# EAGLE board Aquila-2018-Color&MV (EAGLE 9.1.1)
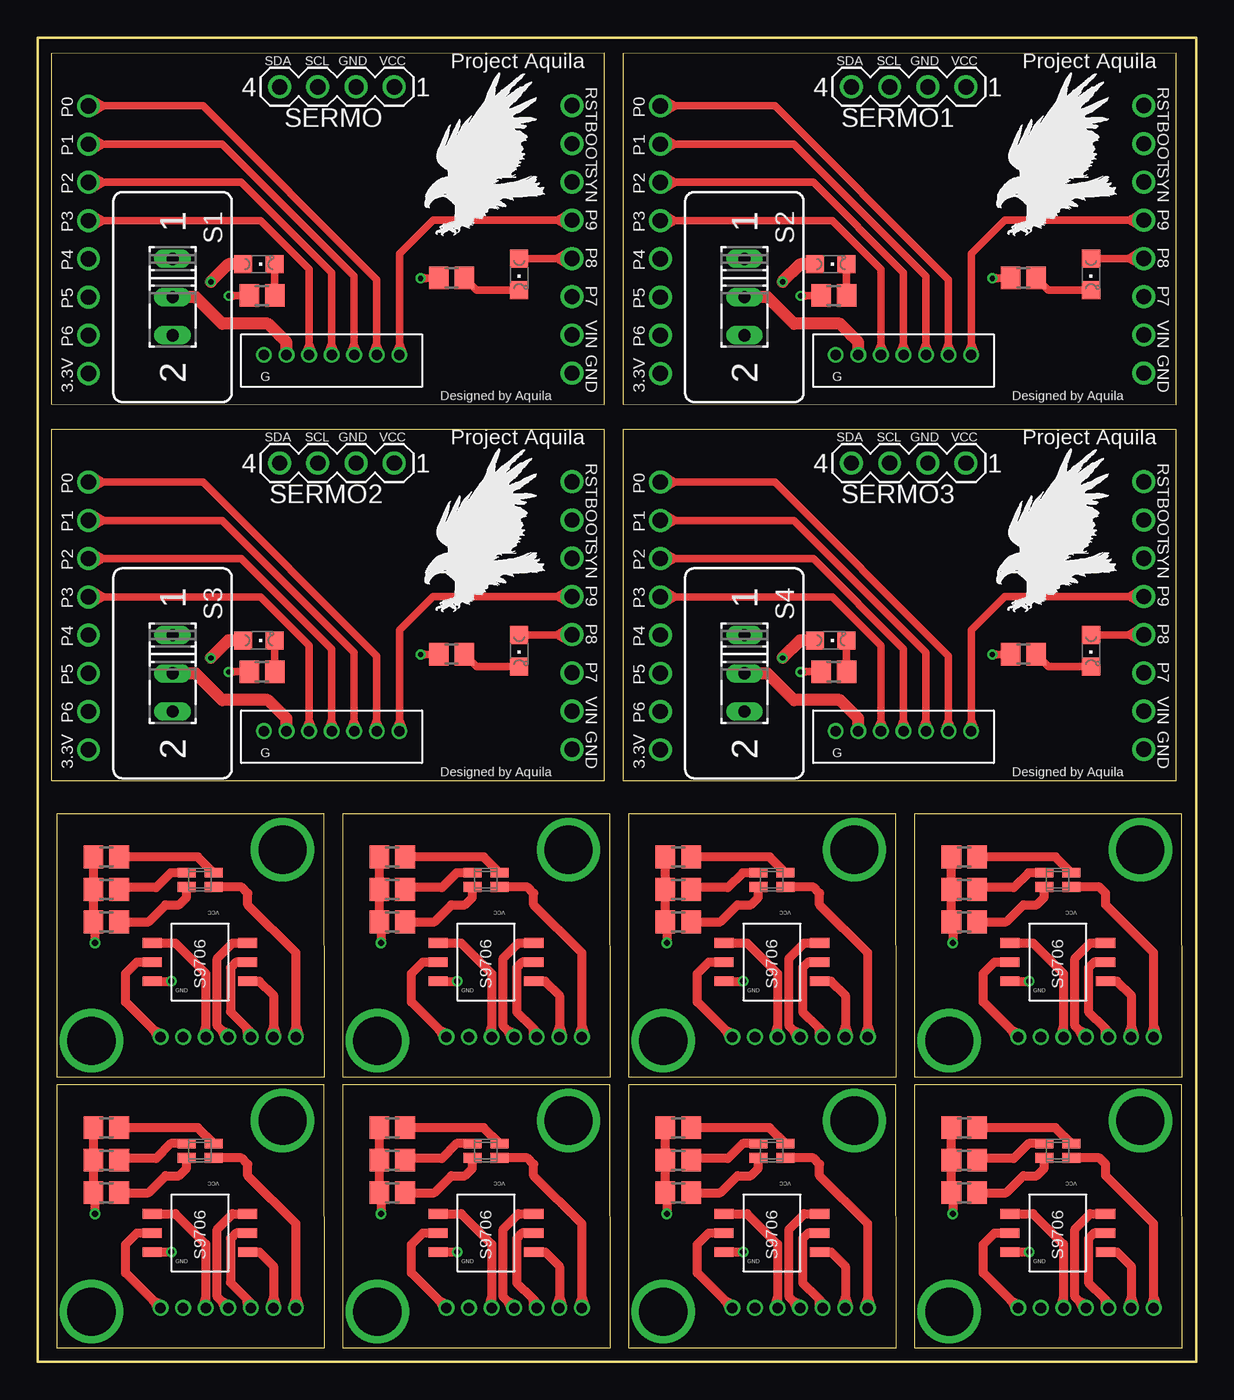
[diagram p0: board, top side]
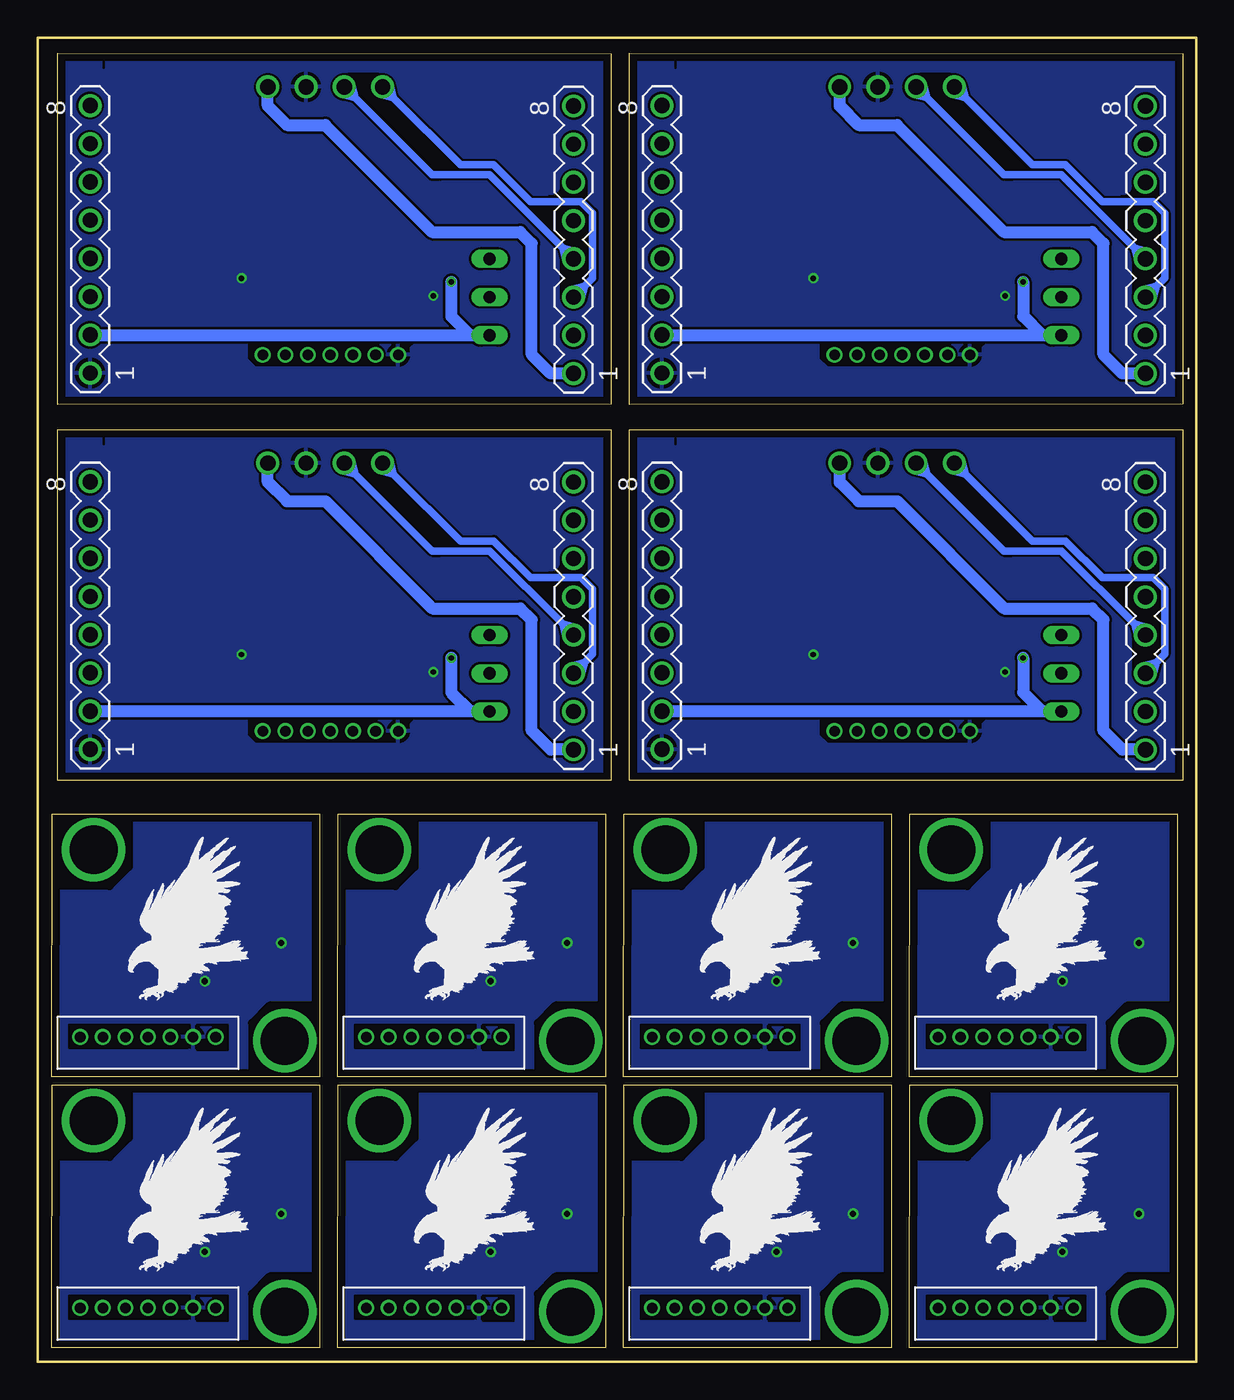
[diagram p1: board, bottom side, seen from below]

Size 77 x 88 mm. Coordinates in mm from the lower left corner, seen from the top.
Outline: 0,0 0,88 77,88 77,0 0,0
Outline: 0.89,63.65 37.67,63.62 37.67,86.97 0.89,86.94 0.89,63.65
Outline: 38.89,63.65 75.67,63.62 75.67,86.97 38.89,86.94 38.89,63.65
Outline: 1.27,0.95 19.07,0.95 19.03,18.4 1.27,18.4 1.27,0.95
Outline: 20.27,0.95 38.07,0.95 38.03,18.4 20.27,18.4 20.27,0.95
Outline: 39.27,0.95 57.07,0.95 57.03,18.4 39.27,18.4 39.27,0.95
Outline: 58.27,0.95 76.07,0.95 76.03,18.4 58.27,18.4 58.27,0.95
Outline: 1.27,18.95 19.07,18.95 19.03,36.4 1.27,36.4 1.27,18.95
Outline: 20.27,18.95 38.07,18.95 38.03,36.4 20.27,36.4 20.27,18.95
Outline: 39.27,18.95 57.07,18.95 57.03,36.4 39.27,36.4 39.27,18.95
Outline: 58.27,18.95 76.07,18.95 76.03,36.4 58.27,36.4 58.27,18.95
Outline: 0.89,38.65 37.67,38.62 37.67,61.97 0.89,61.94 0.89,38.65
Outline: 38.89,38.65 75.67,38.62 75.67,61.97 38.89,61.94 38.89,38.65
Copper layers (1*16): Top 0.035mm / dielectric 1.6mm / Bottom 0.035mm
Design rules "Elecrow_2-layer_PCB_eagle_rule": minimum track width 6mil, minimum drill 12mil, track to track 6mil, track to pad 6mil, pad to pad 6mil, via to via 8mil, smd to smd 0mil, copper to edge 20mil, drill to drill 10mil, minimum pad ring 6mil, minimum via ring 6mil, stop-mask expansion 0mil, vias tented up to drill 100mil, thermal gap 10mil
bRestrict: 140 lines

## Footprints (pad centres in the part's own frame; a part is rotated, then mirrored left to right if it is on the bottom)
B7B-ZR = drill 0.7: 1 10.5,-1.3; 2 9,-1.3; 3 7.5,-1.3; 4 6,-1.3; 5 4.5,-1.3; 6 3,-1.3; 7 1.5,-1.3
CHIPLED_0805 = smd 1.2 x 1.2: A 0,-1.05; C 0,1.05
GM1WA55311A = smd 0.65 x 1.2: 1 -0.475,0.9; 2 -0.475,-0.9; 3 0.475,-0.9; 4 0.475,0.9
R0805 = smd 1.3 x 1.5: 1 -0.85,0; 2 0.85,0
M251 = drill 0.813 long: 1 -2.54,0; 2 0,0; 3 2.54,0
MA04-1 = drill 1.016: 1 -3.81,0; 2 -1.27,0; 3 1.27,0; 4 3.81,0
MA08-1 = drill 1.016: 1 -8.89,0; 2 -6.35,0; 3 -3.81,0; 4 -1.27,0; 5 1.27,0; 6 3.81,0; 7 6.35,0; 8 8.89,0
S9706 = smd 1.27 x 0.635: CK 7.62,3.81; DOUT 1.27,5.08; GATE 7.62,5.08; GND 1.27,2.54; RANGE 7.62,2.54; VDD 1.27,3.81

## Placement (x,y rotation side)
CN5  COLOR-ZH-M  [B7B-ZR]  18.67,4.89 0 bottom
CN6  COLOR-ZH-M  [B7B-ZR]  37.67,4.89 0 bottom
CN7  COLOR-ZH-M  [B7B-ZR]  56.67,4.89 0 bottom
CN8  COLOR-ZH-M  [B7B-ZR]  75.67,4.89 0 bottom
CN9  COLOR-ZH-M  [B7B-ZR]  18.67,22.89 0 bottom
CN10  COLOR-ZH-M  [B7B-ZR]  37.67,22.89 0 bottom
CN11  COLOR-ZH-M  [B7B-ZR]  56.67,22.89 0 bottom
CN12  COLOR-ZH-M  [B7B-ZR]  75.67,22.89 0 bottom
L1  SP-L  [CHIPLED_0805]  14.71,72.94 270 top
L2  LED  [CHIPLED_0805]  32.01,72.26 180 top
L3  SP-L  [CHIPLED_0805]  52.71,72.94 270 top
L4  LED  [CHIPLED_0805]  70.01,72.26 180 top
L5  SP-L  [CHIPLED_0805]  14.71,47.94 270 top
L6  LED  [CHIPLED_0805]  32.01,47.26 180 top
L7  SP-L  [CHIPLED_0805]  52.71,47.94 270 top
L8  LED  [CHIPLED_0805]  70.01,47.26 180 top
LED5  GM1WA55311A  [GM1WA55311A]  10.79,14.03 270 top
LED6  GM1WA55311A  [GM1WA55311A]  29.8,14.03 270 top
LED7  GM1WA55311A  [GM1WA55311A]  48.8,14.03 270 top
LED8  GM1WA55311A  [GM1WA55311A]  67.8,14.03 270 top
LED9  GM1WA55311A  [GM1WA55311A]  10.79,32.03 270 top
LED10  GM1WA55311A  [GM1WA55311A]  29.8,32.03 270 top
LED11  GM1WA55311A  [GM1WA55311A]  48.8,32.03 270 top
LED12  GM1WA55311A  [GM1WA55311A]  67.8,32.03 270 top
LED-R  330  [R0805]  27.51,72.03 0 top
LED-R1  330  [R0805]  65.51,72.03 0 top
LED-R2  330  [R0805]  27.51,47.03 0 top
LED-R3  330  [R0805]  65.51,47.03 0 top
MV1  B7B-ZR  [B7B-ZR]  13.54,68.22 0 top
MV2  B7B-ZR  [B7B-ZR]  51.54,68.22 0 top
MV3  B7B-ZR  [B7B-ZR]  13.54,43.22 0 top
MV4  B7B-ZR  [B7B-ZR]  51.54,43.22 0 top
R13  330  [R0805]  4.57,13.4 0 top
R14  330  [R0805]  4.57,11.24 0 top
R15  330  [R0805]  4.57,15.55 0 top
R16  330  [R0805]  23.57,13.4 0 top
R17  330  [R0805]  23.57,11.24 0 top
R18  330  [R0805]  23.57,15.55 0 top
R19  330  [R0805]  42.57,13.4 0 top
R20  330  [R0805]  42.57,11.24 0 top
R21  330  [R0805]  42.57,15.55 0 top
R22  330  [R0805]  61.57,13.4 0 top
R23  330  [R0805]  61.57,11.24 0 top
R24  330  [R0805]  61.57,15.55 0 top
R25  330  [R0805]  4.57,31.4 0 top
R26  330  [R0805]  4.57,29.24 0 top
R27  330  [R0805]  4.57,33.55 0 top
R28  330  [R0805]  23.57,31.4 0 top
R29  330  [R0805]  23.57,29.24 0 top
R30  330  [R0805]  23.57,33.55 0 top
R31  330  [R0805]  42.57,31.4 0 top
R32  330  [R0805]  42.57,29.24 0 top
R33  330  [R0805]  42.57,33.55 0 top
R34  330  [R0805]  61.57,31.4 0 top
R35  330  [R0805]  61.57,29.24 0 top
R36  330  [R0805]  61.57,33.55 0 top
S1  [M251]  8.97,70.76 270 top
S2  [M251]  46.97,70.76 270 top
S3  [M251]  8.97,45.76 270 top
S4  [M251]  46.97,45.76 270 top
SERMO  [MA04-1]  19.89,84.73 180 top
SERMO1  [MA04-1]  57.89,84.73 180 top
SERMO2  [MA04-1]  19.89,59.73 180 top
SERMO3  [MA04-1]  57.89,59.73 180 top
SP-R  330  [R0805]  14.91,70.86 0 top
SP-R1  330  [R0805]  52.91,70.86 0 top
SP-R2  330  [R0805]  14.91,45.86 0 top
SP-R3  330  [R0805]  52.91,45.86 0 top
SV1  [MA08-1]  35.51,74.6 90 bottom
SV2  [MA08-1]  3.38,74.57 90 bottom
SV3  [MA08-1]  73.51,74.6 90 bottom
SV4  [MA08-1]  41.38,74.57 90 bottom
SV5  [MA08-1]  35.51,49.6 90 bottom
SV6  [MA08-1]  3.38,49.57 90 bottom
SV7  [MA08-1]  73.51,49.6 90 bottom
SV8  [MA08-1]  41.38,49.57 90 bottom
U$1  [EAGLE-PLC-8MM]  25.73,74.82 0 top
U$2  [EAGLE-PLC-8MM]  63.73,74.82 0 top
U$3  [EAGLE-PLC-8MM]  25.73,49.82 0 top
U$4  [EAGLE-PLC-8MM]  63.73,49.82 0 top
U$11  S9706  [S9706]  6.35,22.76 0 top
U$12  [EAGLE-PLC-8MM]  13.97,24.03 0 bottom
U$13  S9706  [S9706]  6.35,4.76 0 top
U$14  [EAGLE-PLC-8MM]  13.97,6.03 0 bottom
U$15  S9706  [S9706]  25.35,4.76 0 top
U$16  [EAGLE-PLC-8MM]  32.97,6.03 0 bottom
U$17  S9706  [S9706]  44.35,4.76 0 top
U$18  [EAGLE-PLC-8MM]  51.97,6.03 0 bottom
U$19  S9706  [S9706]  63.35,4.76 0 top
U$20  [EAGLE-PLC-8MM]  70.97,6.03 0 bottom
U$21  S9706  [S9706]  25.35,22.76 0 top
U$22  [EAGLE-PLC-8MM]  32.97,24.03 0 bottom
U$23  S9706  [S9706]  44.35,22.76 0 top
U$24  [EAGLE-PLC-8MM]  51.97,24.03 0 bottom
U$25  S9706  [S9706]  63.35,22.76 0 top
U$26  [EAGLE-PLC-8MM]  70.97,24.03 0 bottom

## Library data of the parts
CN5-CN12 MV1-MV4 = jst
L1-L8 LED5-LED12 = led
LED-R LED-R1-LED-R3 R13-R36 SP-R SP-R1-SP-R3 = 0@Mylibrary-main1
S1-S4 = switch
SERMO SERMO1-SERMO3 SV1-SV8 = 0con-lstb; OC_FARNELL: unknown; OC_NEWARK: unknown
U$1-U$4 U$12 U$14 U$16 U$18 U$20 U$22 U$24 U$26 = logo
U$11 U$13 U$15 U$17 U$19 U$21 U$23 U$25 = S9706

## Nets
+3V1: SERMO1.1 SV4.1
+3V2: SERMO2.1 SV6.1
+3V3: SERMO.1 SV2.1
+3V4: SERMO3.1 SV8.1
+3V7: CN9.1 U$11.VDD
+3V8: CN10.1 U$21.VDD
+3V9: CN5.1 U$13.VDD
+3V10: CN6.1 U$15.VDD
+3V11: CN7.1 U$17.VDD
+3V12: CN8.1 U$19.VDD
+3V13: CN11.1 U$23.VDD
+3V14: CN12.1 U$25.VDD
+5V: L1.A S1.3 SV1.2
+5V1: L3.A S2.3 SV3.2
+5V2: L5.A S3.3 SV5.2
+5V3: L7.A S4.3 SV7.2
+5V6: CN9.7 LED9.4
+5V7: CN10.7 LED10.4
+5V8: CN5.7 LED5.4
+5V9: CN6.7 LED6.4
+5V10: CN7.7 LED7.4
+5V11: CN8.7 LED8.4
+5V12: CN11.7 LED11.4
+5V13: CN12.7 LED12.4
BOOT: SV1.7
BOOT1: SV3.7
BOOT2: SV5.7
BOOT3: SV7.7
CK4: CN5.5 U$13.CK
CK5: CN6.5 U$15.CK
CK6: CN7.5 U$17.CK
CK7: CN8.5 U$19.CK
CK8: CN9.5 U$11.CK
CK9: CN10.5 U$21.CK
CK10: CN11.5 U$23.CK
CK11: CN12.5 U$25.CK
DOUT4: CN5.3 U$13.DOUT
DOUT5: CN6.3 U$15.DOUT
DOUT6: CN7.3 U$17.DOUT
DOUT7: CN8.3 U$19.DOUT
DOUT8: CN9.3 U$11.DOUT
DOUT9: CN10.3 U$21.DOUT
DOUT10: CN11.3 U$23.DOUT
DOUT11: CN12.3 U$25.DOUT
GATE4: CN5.4 U$13.GATE
GATE5: CN6.4 U$15.GATE
GATE6: CN7.4 U$17.GATE
GATE7: CN8.4 U$19.GATE
GATE8: CN9.4 U$11.GATE
GATE9: CN10.4 U$21.GATE
GATE10: CN11.4 U$23.GATE
GATE11: CN12.4 U$25.GATE
GND: LED-R.1 MV1.7 SERMO.2 SP-R.1 SV1.1
GND1: LED-R1.1 MV2.7 SERMO1.2 SP-R1.1 SV3.1
GND2: LED-R2.1 MV3.7 SERMO2.2 SP-R2.1 SV5.1
GND3: LED-R3.1 MV4.7 SERMO3.2 SP-R3.1 SV7.1
GND6: CN9.2 R25.1 R26.1 R27.1 U$11.GND
GND7: CN10.2 R28.1 R29.1 R30.1 U$21.GND
GND8: CN5.2 R13.1 R14.1 R15.1 U$13.GND
GND9: CN6.2 R16.1 R17.1 R18.1 U$15.GND
GND10: CN7.2 R19.1 R20.1 R21.1 U$17.GND
GND11: CN8.2 R22.1 R23.1 R24.1 U$19.GND
GND12: CN11.2 R31.1 R32.1 R33.1 U$23.GND
GND13: CN12.2 R34.1 R35.1 R36.1 U$25.GND
MISOD: MV1.3 SV2.7
MISOD1: MV2.3 SV4.7
MISOD2: MV3.3 SV6.7
MISOD3: MV4.3 SV8.7
MOSID: MV1.2 SV2.8
MOSID1: MV2.2 SV4.8
MOSID2: MV3.2 SV6.8
MOSID3: MV4.2 SV8.8
MV: MV1.1 SV1.5
MV1: MV2.1 SV3.5
MV2: MV3.1 SV5.5
MV3: MV4.1 SV7.5
MVS: MV1.5 SV2.5
MVS1: MV2.5 SV4.5
MVS2: MV3.5 SV6.5
MVS3: MV4.5 SV8.5
N$1: MV1.6 S1.2
N$2: L2.C LED-R.2
N$3: MV2.6 S2.2
N$4: L3.C SP-R1.2
N$5: L4.C LED-R1.2
N$6: MV3.6 S3.2
N$7: L5.C SP-R2.2
N$8: L6.C LED-R2.2
N$9: MV4.6 S4.2
N$10: L7.C SP-R3.2
N$11: L8.C LED-R3.2
N$25: LED9.2 R25.2
N$26: LED9.3 R26.2
N$27: LED9.1 R27.2
N$30: LED10.2 R28.2
N$31: LED5.2 R13.2
N$32: LED5.3 R14.2
N$33: LED5.1 R15.2
N$36: LED6.2 R16.2
N$37: LED6.3 R17.2
N$38: LED6.1 R18.2
N$41: LED7.2 R19.2
N$42: LED7.3 R20.2
N$43: L1.C SP-R.2
N$44: LED7.1 R21.2
N$48: LED8.2 R22.2
N$49: LED8.3 R23.2
N$50: LED8.1 R24.2
N$53: LED10.3 R29.2
N$54: LED10.1 R30.2
N$57: LED11.2 R31.2
N$58: LED11.3 R32.2
N$59: LED11.1 R33.2
N$62: LED12.2 R34.2
N$63: LED12.3 R35.2
N$64: LED12.1 R36.2
P1: L4.A SV3.4
P2: SV3.3
P3: SERMO1.3 SV4.4
P4: SERMO.3 SV2.4
P5: SERMO.4 SV2.3
P6: SV2.2
P7: SV1.3
P8: L2.A SV1.4
P9: SERMO1.4 SV4.3
P10: SV4.2
P11: L6.A SV5.4
P12: SV5.3
P13: SERMO2.3 SV6.4
P14: SERMO2.4 SV6.3
P15: SV6.2
P16: L8.A SV7.4
P17: SV7.3
P18: SERMO3.3 SV8.4
P19: SERMO3.4 SV8.3
P20: SV8.2
RANGE4: CN5.6 U$13.RANGE
RANGE5: CN6.6 U$15.RANGE
RANGE6: CN7.6 U$17.RANGE
RANGE7: CN8.6 U$19.RANGE
RANGE8: CN9.6 U$11.RANGE
RANGE9: CN10.6 U$21.RANGE
RANGE10: CN11.6 U$23.RANGE
RANGE11: CN12.6 U$25.RANGE
RST: SV1.8
RST1: SV3.8
RST2: SV5.8
RST3: SV7.8
SCKD: MV1.4 SV2.6
SCKD1: MV2.4 SV4.6
SCKD2: MV3.4 SV6.6
SCKD3: MV4.4 SV8.6
SYN: SV1.6
SYN1: SV3.6
SYN2: SV5.6
SYN3: SV7.6

## Tracks (layer width: path | path; a pad name or v marks a point on that pad's centre or on a via)
+3V1
  Bottom 0.813: SERMO1.1 61.7,83.46 60.43,82.19 57.89,82.19 50.78,75.08 44.94,75.08 44.17,74.32 44.17,66.95 42.9,65.68 SV4.1
+3V2
  Bottom 0.813: SERMO2.1 23.7,58.46 22.43,57.19 19.89,57.19 12.78,50.08 6.94,50.08 6.17,49.32 6.17,41.95 4.9,40.68 SV6.1
+3V3
  Bottom 0.813: SERMO.1 23.7,83.46 22.43,82.19 19.89,82.19 12.78,75.08 6.94,75.08 6.17,74.32 6.17,66.95 4.9,65.68 SV2.1
+3V4
  Bottom 0.813: SERMO3.1 61.7,58.46 60.43,57.19 57.89,57.19 50.78,50.08 44.94,50.08 44.17,49.32 44.17,41.95 42.9,40.68 SV8.1
+3V7
  Top 0.61: CN9.1 7.67,22.08 | 7.67,22.08 5.84,23.91 5.84,25.81 6.6,26.57 U$11.VDD | 7.67,22.08 7.97,21.49 CN9.1 | 7.67,22.08 8.27,21.78 CN9.1
+3V8
  Top 0.61: CN10.1 26.67,22.08 | 26.67,22.08 24.84,23.91 24.84,25.81 25.6,26.57 U$21.VDD | 26.67,22.08 26.97,21.49 CN10.1 | 26.67,22.08 27.27,21.78 CN10.1
+3V9
  Top 0.61: CN5.1 7.67,4.08 | 7.67,4.08 5.84,5.91 5.84,7.81 6.6,8.57 U$13.VDD | 7.67,4.08 7.97,3.49 CN5.1 | 7.67,4.08 8.27,3.78 CN5.1
+3V10
  Top 0.61: CN6.1 26.67,4.08 | 26.67,4.08 24.84,5.91 24.84,7.81 25.6,8.57 U$15.VDD | 26.67,4.08 26.97,3.49 CN6.1 | 26.67,4.08 27.27,3.78 CN6.1
+3V11
  Top 0.61: CN7.1 45.67,4.08 | 45.67,4.08 43.84,5.91 43.84,7.81 44.6,8.57 U$17.VDD | 45.67,4.08 45.97,3.49 CN7.1 | 45.67,4.08 46.27,3.78 CN7.1
+3V12
  Top 0.61: CN8.1 64.67,4.08 | 64.67,4.08 62.84,5.91 62.84,7.81 63.6,8.57 U$19.VDD | 64.67,4.08 64.97,3.49 CN8.1 | 64.67,4.08 65.27,3.78 CN8.1
+3V13
  Top 0.61: CN11.1 45.67,22.08 | 45.67,22.08 43.84,23.91 43.84,25.81 44.6,26.57 U$23.VDD | 45.67,22.08 45.97,21.49 CN11.1 | 45.67,22.08 46.27,21.78 CN11.1
+3V14
  Top 0.61: CN12.1 64.67,22.08 | 64.67,22.08 62.84,23.91 62.84,25.81 63.6,26.57 U$25.VDD | 64.67,22.08 64.97,21.49 CN12.1 | 64.67,22.08 65.27,21.78 CN12.1
+5V  (via drill 0.35)
  Top 0.813: L1.A 12.68,72.94 v11.51,71.78
  Bottom 0.813: S1.3 8.99,68.25 10.26,68.25 | SV1.2 10.26,68.25 | v11.51,71.78 11.51,69.49 10.26,68.25
+5V1  (via drill 0.35)
  Top 0.813: L3.A 50.68,72.94 v49.51,71.78
  Bottom 0.813: S2.3 46.99,68.25 48.26,68.25 | SV3.2 48.26,68.25 | v49.51,71.78 49.51,69.49 48.26,68.25
+5V2  (via drill 0.35)
  Top 0.813: L5.A 12.68,47.94 v11.51,46.78
  Bottom 0.813: S3.3 8.99,43.24 10.26,43.24 | SV5.2 10.26,43.24 | v11.51,46.78 11.51,44.49 10.26,43.24
+5V3  (via drill 0.35)
  Top 0.813: L7.A 50.68,47.94 v49.51,46.78
  Bottom 0.813: S4.3 46.99,43.24 48.26,43.24 | SV7.2 48.26,43.24 | v49.51,46.78 49.51,44.49 48.26,43.24
+5V6
  Top 0.61: CN9.7 17.17,22.29 | 17.17,22.29 17.17,27.18 13.97,30.38 13.97,31.14 13.56,31.56 LED9.4 | 17.17,22.29 16.96,21.66 CN9.7 | 17.17,22.29 17.38,21.66 CN9.7
+5V7
  Top 0.61: CN10.7 36.17,22.29 | 36.17,22.29 36.17,27.18 32.97,30.38 32.97,31.14 32.56,31.56 LED10.4 | 36.17,22.29 35.96,21.66 CN10.7 | 36.17,22.29 36.38,21.66 CN10.7
+5V8
  Top 0.61: CN5.7 17.17,4.29 | 17.17,4.29 17.17,9.18 13.97,12.38 13.97,13.14 13.56,13.56 LED5.4 | 17.17,4.29 16.96,3.66 CN5.7 | 17.17,4.29 17.38,3.66 CN5.7
+5V9
  Top 0.61: CN6.7 36.17,4.29 | 36.17,4.29 36.17,9.18 32.97,12.38 32.97,13.14 32.56,13.56 LED6.4 | 36.17,4.29 35.96,3.66 CN6.7 | 36.17,4.29 36.38,3.66 CN6.7
+5V10
  Top 0.61: CN7.7 55.17,4.29 | 55.17,4.29 55.17,9.18 51.97,12.38 51.97,13.14 51.56,13.56 LED7.4 | 55.17,4.29 54.96,3.66 CN7.7 | 55.17,4.29 55.38,3.66 CN7.7
+5V11
  Top 0.61: CN8.7 74.17,4.29 | 74.17,4.29 74.17,9.18 70.97,12.38 70.97,13.14 70.56,13.56 LED8.4 | 74.17,4.29 73.96,3.66 CN8.7 | 74.17,4.29 74.38,3.66 CN8.7
+5V12
  Top 0.61: CN11.7 55.17,22.29 | 55.17,22.29 55.17,27.18 51.97,30.38 51.97,31.14 51.56,31.56 LED11.4 | 55.17,22.29 54.96,21.66 CN11.7 | 55.17,22.29 55.38,21.66 CN11.7
+5V13
  Top 0.61: CN12.7 74.17,22.29 | 74.17,22.29 74.17,27.18 70.97,30.38 70.97,31.14 70.56,31.56 LED12.4 | 74.17,22.29 73.96,21.66 CN12.7 | 74.17,22.29 74.38,21.66 CN12.7
CK4
  Top 0.61: U$13.CK 13.21,8.57 12.83,8.19 12.83,5.27 13.87,4.22 | 13.87,4.22 14.17,3.93 CN5.5 | 13.87,4.22 13.95,3.56 CN5.5 | 13.87,4.22 14.33,3.74 CN5.5
CK5
  Top 0.61: U$15.CK 32.21,8.57 31.83,8.19 31.83,5.27 32.87,4.22 | 32.87,4.22 33.17,3.93 CN6.5 | 32.87,4.22 32.95,3.56 CN6.5 | 32.87,4.22 33.33,3.74 CN6.5
CK6
  Top 0.61: U$17.CK 51.21,8.57 50.83,8.19 50.83,5.27 51.87,4.22 | 51.87,4.22 52.17,3.93 CN7.5 | 51.87,4.22 51.95,3.56 CN7.5 | 51.87,4.22 52.33,3.74 CN7.5
CK7
  Top 0.61: U$19.CK 70.21,8.57 69.83,8.19 69.83,5.27 70.87,4.22 | 70.87,4.22 71.17,3.93 CN8.5 | 70.87,4.22 70.95,3.56 CN8.5 | 70.87,4.22 71.33,3.74 CN8.5
CK8
  Top 0.61: U$11.CK 13.21,26.57 12.83,26.19 12.83,23.27 13.87,22.22 | 13.87,22.22 14.17,21.93 CN9.5 | 13.87,22.22 13.95,21.56 CN9.5 | 13.87,22.22 14.33,21.74 CN9.5
CK9
  Top 0.61: U$21.CK 32.21,26.57 31.83,26.19 31.83,23.27 32.87,22.22 | 32.87,22.22 33.17,21.93 CN10.5 | 32.87,22.22 32.95,21.56 CN10.5 | 32.87,22.22 33.33,21.74 CN10.5
CK10
  Top 0.61: U$23.CK 51.21,26.57 50.83,26.19 50.83,23.27 51.87,22.22 | 51.87,22.22 52.17,21.93 CN11.5 | 51.87,22.22 51.95,21.56 CN11.5 | 51.87,22.22 52.33,21.74 CN11.5
CK11
  Top 0.61: U$25.CK 70.21,26.57 69.83,26.19 69.83,23.27 70.87,22.22 | 70.87,22.22 71.17,21.93 CN12.5 | 70.87,22.22 70.95,21.56 CN12.5 | 70.87,22.22 71.33,21.74 CN12.5
DOUT4
  Top 0.61: U$13.DOUT 9.14,9.84 11.17,7.82 11.17,4.29 | 11.17,4.29 CN5.3 10.96,3.66 11.17,4.29
DOUT5
  Top 0.61: U$15.DOUT 28.14,9.84 30.17,7.82 30.17,4.29 | 30.17,4.29 CN6.3 29.96,3.66 30.17,4.29
DOUT6
  Top 0.61: U$17.DOUT 47.14,9.84 49.17,7.82 49.17,4.29 | 49.17,4.29 CN7.3 48.96,3.66 49.17,4.29
DOUT7
  Top 0.61: U$19.DOUT 66.14,9.84 68.17,7.82 68.17,4.29 | 68.17,4.29 CN8.3 67.96,3.66 68.17,4.29
DOUT8
  Top 0.61: U$11.DOUT 9.14,27.84 11.17,25.81 11.17,22.29 | 11.17,22.29 CN9.3 10.96,21.66 11.17,22.29
DOUT9
  Top 0.61: U$21.DOUT 28.14,27.84 30.17,25.81 30.17,22.29 | 30.17,22.29 CN10.3 29.96,21.66 30.17,22.29
DOUT10
  Top 0.61: U$23.DOUT 47.14,27.84 49.17,25.81 49.17,22.29 | 49.17,22.29 CN11.3 48.96,21.66 49.17,22.29
DOUT11
  Top 0.61: U$25.DOUT 66.14,27.84 68.17,25.81 68.17,22.29 | 68.17,22.29 CN12.3 67.96,21.66 68.17,22.29
GATE4
  Top 0.61: CN5.4 12.17,4.08 | 12.17,4.08 11.94,4.32 11.94,8.82 12.95,9.84 U$13.GATE | 12.17,4.08 12.47,3.49 CN5.4 | 12.17,4.08 12.77,3.78 CN5.4
GATE5
  Top 0.61: CN6.4 31.17,4.08 | 31.17,4.08 30.94,4.32 30.94,8.82 31.95,9.84 U$15.GATE | 31.17,4.08 31.47,3.49 CN6.4 | 31.17,4.08 31.77,3.78 CN6.4
GATE6
  Top 0.61: CN7.4 50.17,4.08 | 50.17,4.08 49.94,4.32 49.94,8.82 50.95,9.84 U$17.GATE | 50.17,4.08 50.47,3.49 CN7.4 | 50.17,4.08 50.77,3.78 CN7.4
GATE7
  Top 0.61: CN8.4 69.17,4.08 | 69.17,4.08 68.94,4.32 68.94,8.82 69.95,9.84 U$19.GATE | 69.17,4.08 69.47,3.49 CN8.4 | 69.17,4.08 69.77,3.78 CN8.4
GATE8
  Top 0.61: CN9.4 12.17,22.08 | 12.17,22.08 11.94,22.32 11.94,26.82 12.95,27.84 U$11.GATE | 12.17,22.08 12.47,21.49 CN9.4 | 12.17,22.08 12.77,21.78 CN9.4
GATE9
  Top 0.61: CN10.4 31.17,22.08 | 31.17,22.08 30.94,22.32 30.94,26.82 31.95,27.84 U$21.GATE | 31.17,22.08 31.47,21.49 CN10.4 | 31.17,22.08 31.77,21.78 CN10.4
GATE10
  Top 0.61: CN11.4 50.17,22.08 | 50.17,22.08 49.94,22.32 49.94,26.82 50.95,27.84 U$23.GATE | 50.17,22.08 50.47,21.49 CN11.4 | 50.17,22.08 50.77,21.78 CN11.4
GATE11
  Top 0.61: CN12.4 69.17,22.08 | 69.17,22.08 68.94,22.32 68.94,26.82 69.95,27.84 U$25.GATE | 69.17,22.08 69.47,21.49 CN12.4 | 69.17,22.08 69.77,21.78 CN12.4
GND  (via drill 0.35)
  Top 0.508: LED-R.1 arc-90 26.64,72 25.98,72 | 25.98,72 v25.45,72 | SP-R.1 13.23,70.86 | 13.23,70.86 12.98,70.86 v12.7,70.84 | 25.98,72 25.46,72.08 v25.45,72 | 25.98,72 25.46,71.93 v25.45,72 | 13.23,70.86 12.71,70.91 v12.7,70.84 | 13.23,70.86 12.72,70.76 v12.7,70.84
  pour Bottom: 0.84,88.54 37.67,88.54 37.67,63.14 0.84,63.14
GND1  (via drill 0.35)
  Top 0.508: LED-R1.1 arc-90 64.64,72 63.98,72 | 63.98,72 v63.45,72 | SP-R1.1 51.23,70.86 | 51.23,70.86 50.98,70.86 v50.7,70.84 | 63.98,72 63.46,72.08 v63.45,72 | 63.98,72 63.46,71.93 v63.45,72 | 51.23,70.86 50.71,70.91 v50.7,70.84 | 51.23,70.86 50.72,70.76 v50.7,70.84
  pour Bottom: 38.84,88.54 75.67,88.54 75.67,63.14 38.84,63.14
GND2  (via drill 0.35)
  Top 0.508: LED-R2.1 arc-90 26.64,47.01 25.98,47.01 | 25.98,47.01 v25.45,47.01 | SP-R2.1 13.23,45.86 | 13.23,45.86 12.98,45.86 v12.7,45.84 | 25.98,47.01 25.46,47.08 v25.45,47.01 | 25.98,47.01 25.46,46.93 v25.45,47.01 | 13.23,45.86 12.71,45.91 v12.7,45.84 | 13.23,45.86 12.72,45.76 v12.7,45.84
  pour Bottom: 0.84,63.54 37.67,63.54 37.67,38.14 0.84,38.14
GND3  (via drill 0.35)
  Top 0.508: LED-R3.1 arc-90 64.64,47.01 63.98,47.01 | 63.98,47.01 v63.45,47.01 | SP-R3.1 51.23,45.86 | 51.23,45.86 50.98,45.86 v50.7,45.84 | 63.98,47.01 63.46,47.08 v63.45,47.01 | 63.98,47.01 63.46,46.93 v63.45,47.01 | 51.23,45.86 50.71,45.91 v50.7,45.84 | 51.23,45.86 50.72,45.76 v50.7,45.84
  pour Bottom: 38.84,63.54 75.67,63.54 75.67,38.14 38.84,38.14
GND6  (via drill 0.4)
  Top 0.61: U$11.GND v8.89,25.3 | R27.1 R25.1 R26.1 3.81,29.15 v3.81,27.84
  pour Bottom: 1.27,36.73 19.05,36.73 19.05,18.95 1.27,18.95
GND7  (via drill 0.4)
  Top 0.61: U$21.GND v27.89,25.3 | R30.1 R28.1 R29.1 22.81,29.15 v22.81,27.84
  pour Bottom: 20.27,36.73 38.05,36.73 38.05,18.95 20.27,18.95
GND8  (via drill 0.4)
  Top 0.61: U$13.GND v8.89,7.3 | R15.1 R13.1 R14.1 3.81,11.15 v3.81,9.84
  pour Bottom: 1.27,18.73 19.05,18.73 19.05,0.95 1.27,0.95
GND9  (via drill 0.4)
  Top 0.61: U$15.GND v27.89,7.3 | R18.1 R16.1 R17.1 22.81,11.15 v22.81,9.84
  pour Bottom: 20.27,18.73 38.05,18.73 38.05,0.95 20.27,0.95
GND10  (via drill 0.4)
  Top 0.61: U$17.GND v46.89,7.3 | R21.1 R19.1 R20.1 41.81,11.15 v41.81,9.84
  pour Bottom: 39.27,18.73 57.05,18.73 57.05,0.95 39.27,0.95
GND11  (via drill 0.4)
  Top 0.61: U$19.GND v65.89,7.3 | R24.1 R22.1 R23.1 60.81,11.15 v60.81,9.84
  pour Bottom: 58.27,18.73 76.05,18.73 76.05,0.95 58.27,0.95
GND12  (via drill 0.4)
  Top 0.61: U$23.GND v46.89,25.3 | R33.1 R31.1 R32.1 41.81,29.15 v41.81,27.84
  pour Bottom: 39.27,36.73 57.05,36.73 57.05,18.95 39.27,18.95
GND13  (via drill 0.4)
  Top 0.61: U$25.GND v65.89,25.3 | R36.1 R34.1 R35.1 60.81,29.15 v60.81,27.84
  pour Bottom: 58.27,36.73 76.05,36.73 76.05,18.95 58.27,18.95
MISOD
  Top 0.508: MV1.3 21.04,67.62 | 21.04,67.62 21.04,72.15 12.27,80.92 4.4,80.92 | 4.4,80.92 SV2.7 | 21.04,67.62 20.79,67.03 MV1.3 | 21.04,67.62 21.29,67.03 MV1.3 | 4.4,80.92 3.63,81.36 SV2.7 | 4.4,80.92 3.63,80.48 SV2.7
MISOD1
  Top 0.508: MV2.3 59.04,67.62 | 59.04,67.62 59.04,72.15 50.27,80.92 42.4,80.92 | 42.4,80.92 SV4.7 | 59.04,67.62 58.79,67.03 MV2.3 | 59.04,67.62 59.29,67.03 MV2.3 | 42.4,80.92 41.63,81.36 SV4.7 | 42.4,80.92 41.63,80.48 SV4.7
MISOD2
  Top 0.508: MV3.3 21.04,42.62 | 21.04,42.62 21.04,47.15 12.27,55.92 4.4,55.92 | 4.4,55.92 SV6.7 | 21.04,42.62 20.79,42.02 MV3.3 | 21.04,42.62 21.29,42.02 MV3.3 | 4.4,55.92 3.63,56.36 SV6.7 | 4.4,55.92 3.63,55.48 SV6.7
MISOD3
  Top 0.508: MV4.3 59.04,42.62 | 59.04,42.62 59.04,47.15 50.27,55.92 42.4,55.92 | 42.4,55.92 SV8.7 | 59.04,42.62 58.79,42.02 MV4.3 | 59.04,42.62 59.29,42.02 MV4.3 | 42.4,55.92 41.63,56.36 SV8.7 | 42.4,55.92 41.63,55.48 SV8.7
MOSID
  Top 0.508: SV2.8 4.4,83.46 | 4.4,83.46 11,83.46 22.54,71.92 22.54,67.62 | 22.54,67.62 MV1.2 | 22.54,67.62 22.29,67.03 MV1.2 | 22.54,67.62 22.79,67.03 MV1.2 | 4.4,83.46 3.63,83.9 SV2.8 | 4.4,83.46 3.63,83.02 SV2.8
MOSID1
  Top 0.508: SV4.8 42.4,83.46 | 42.4,83.46 49,83.46 60.54,71.92 60.54,67.62 | 60.54,67.62 MV2.2 | 60.54,67.62 60.29,67.03 MV2.2 | 60.54,67.62 60.79,67.03 MV2.2 | 42.4,83.46 41.63,83.9 SV4.8 | 42.4,83.46 41.63,83.02 SV4.8
MOSID2
  Top 0.508: SV6.8 4.4,58.46 | 4.4,58.46 11,58.46 22.54,46.92 22.54,42.62 | 22.54,42.62 MV3.2 | 22.54,42.62 22.29,42.02 MV3.2 | 22.54,42.62 22.79,42.02 MV3.2 | 4.4,58.46 3.63,58.9 SV6.8 | 4.4,58.46 3.63,58.02 SV6.8
MOSID3
  Top 0.508: SV8.8 42.4,58.46 | 42.4,58.46 49,58.46 60.54,46.92 60.54,42.62 | 60.54,42.62 MV4.2 | 60.54,42.62 60.29,42.02 MV4.2 | 60.54,42.62 60.79,42.02 MV4.2 | 42.4,58.46 41.63,58.9 SV8.8 | 42.4,58.46 41.63,58.02 SV8.8
MV
  Top 0.508: 24.04,67.62 24.04,73.64 26.27,75.86 34.49,75.86 | 24.04,67.62 MV1.1 | SV1.5 34.49,75.86 | 24.04,67.62 23.79,67.03 MV1.1 | 24.04,67.62 24.29,67.03 MV1.1 | 34.49,75.86 35.26,75.42 SV1.5 | 34.49,75.86 35.26,76.31 SV1.5
MV1
  Top 0.508: 62.04,67.62 62.04,73.64 64.27,75.86 72.5,75.86 | 62.04,67.62 MV2.1 | SV3.5 72.5,75.86 | 62.04,67.62 61.79,67.03 MV2.1 | 62.04,67.62 62.29,67.03 MV2.1 | 72.5,75.86 73.26,75.42 SV3.5 | 72.5,75.86 73.26,76.31 SV3.5
MV2
  Top 0.508: 24.04,42.62 24.04,48.64 26.27,50.87 34.49,50.87 | 24.04,42.62 MV3.1 | SV5.5 34.49,50.87 | 24.04,42.62 23.79,42.02 MV3.1 | 24.04,42.62 24.29,42.02 MV3.1 | 34.49,50.87 35.26,50.42 SV5.5 | 34.49,50.87 35.26,51.3 SV5.5
MV3
  Top 0.508: 62.04,42.62 62.04,48.64 64.27,50.87 72.5,50.87 | 62.04,42.62 MV4.1 | SV7.5 72.5,50.87 | 62.04,42.62 61.79,42.02 MV4.1 | 62.04,42.62 62.29,42.02 MV4.1 | 72.5,50.87 73.26,50.42 SV7.5 | 72.5,50.87 73.26,51.3 SV7.5
MVS
  Top 0.508: SV2.5 4.4,75.84 | 4.4,75.84 14.81,75.84 18.04,72.61 18.04,67.62 | 18.04,67.62 MV1.5 | 4.4,75.84 3.63,76.28 SV2.5 | 4.4,75.84 3.63,75.4 SV2.5 | 18.04,67.62 17.79,67.03 MV1.5 | 18.04,67.62 18.29,67.03 MV1.5
MVS1
  Top 0.508: SV4.5 42.4,75.84 | 42.4,75.84 52.81,75.84 56.04,72.61 56.04,67.62 | 56.04,67.62 MV2.5 | 42.4,75.84 41.63,76.28 SV4.5 | 42.4,75.84 41.63,75.4 SV4.5 | 56.04,67.62 55.79,67.03 MV2.5 | 56.04,67.62 56.29,67.03 MV2.5
MVS2
  Top 0.508: SV6.5 4.4,50.84 | 4.4,50.84 14.81,50.84 18.04,47.61 18.04,42.62 | 18.04,42.62 MV3.5 | 4.4,50.84 3.63,51.28 SV6.5 | 4.4,50.84 3.63,50.4 SV6.5 | 18.04,42.62 17.79,42.02 MV3.5 | 18.04,42.62 18.29,42.02 MV3.5
MVS3
  Top 0.508: SV8.5 42.4,50.84 | 42.4,50.84 52.81,50.84 56.04,47.61 56.04,42.62 | 56.04,42.62 MV4.5 | 42.4,50.84 41.63,51.28 SV8.5 | 42.4,50.84 41.63,50.4 SV8.5 | 56.04,42.62 55.79,42.02 MV4.5 | 56.04,42.62 56.29,42.02 MV4.5
N$1
  Top 0.813: MV1.6 16.54,67.76 16.08,68.22 15.32,68.98 12.27,68.98 10.49,70.76 S1.2
N$2
  Top 0.508: LED-R.2 29.18,71.21 L2.C
N$3
  Top 0.813: MV2.6 54.54,67.76 54.08,68.22 53.32,68.98 50.27,68.98 48.49,70.76 S2.2
N$4
  Top 0.508: L3.C SP-R1.2
N$5
  Top 0.508: LED-R1.2 67.18,71.21 L4.C
N$6
  Top 0.813: MV3.6 16.54,42.76 16.08,43.22 15.32,43.98 12.27,43.98 10.49,45.76 S3.2
N$7
  Top 0.508: L5.C SP-R2.2
N$8
  Top 0.508: LED-R2.2 29.18,46.21 L6.C
N$9
  Top 0.813: MV4.6 54.54,42.76 54.08,43.22 53.32,43.98 50.27,43.98 48.49,45.76 S4.2
N$10
  Top 0.508: L7.C SP-R3.2
N$11
  Top 0.508: LED-R3.2 67.18,46.21 L8.C
N$25
  Top 0.61: LED9.2 8.86,32.51 7.87,31.52 5.55,31.52 R25.2
N$26
  Top 0.61: R26.2 7.37,29.24 8.51,30.38 9.4,30.38 9.89,30.88 LED9.3
N$27
  Top 0.61: LED9.1 10.65,33.55 R27.2
N$28  (via drill 3.2 pad 0.25)
  other vias: 3.58,21.34
N$29  (via drill 3.2 pad 0.25)
  other vias: 16.28,34.04
N$30
  Top 0.61: LED10.2 27.86,32.51 26.87,31.52 24.55,31.52 R28.2
N$31
  Top 0.61: LED5.2 8.86,14.51 7.87,13.52 5.55,13.52 R13.2
N$32
  Top 0.61: R14.2 7.37,11.24 8.51,12.38 9.4,12.38 9.89,12.88 LED5.3
N$33
  Top 0.61: LED5.1 10.65,15.55 R15.2
N$34  (via drill 3.2 pad 0.25)
  other vias: 3.58,3.34
N$35  (via drill 3.2 pad 0.25)
  other vias: 16.28,16.04
N$36
  Top 0.61: LED6.2 27.86,14.51 26.87,13.52 24.55,13.52 R16.2
N$37
  Top 0.61: R17.2 26.37,11.24 27.51,12.38 28.4,12.38 28.89,12.88 LED6.3
N$38
  Top 0.61: LED6.1 29.65,15.55 R18.2
N$39  (via drill 3.2 pad 0.25)
  other vias: 22.58,3.34
N$40  (via drill 3.2 pad 0.25)
  other vias: 35.28,16.04
N$41
  Top 0.61: LED7.2 46.86,14.51 45.87,13.52 43.55,13.52 R19.2
N$42
  Top 0.61: R20.2 45.37,11.24 46.51,12.38 47.4,12.38 47.9,12.88 LED7.3
N$43
  Top 0.508: L1.C SP-R.2
N$44
  Top 0.61: LED7.1 48.65,15.55 R21.2
N$46  (via drill 3.2 pad 0.25)
  other vias: 41.58,3.34
N$47  (via drill 3.2 pad 0.25)
  other vias: 54.28,16.04
N$48
  Top 0.61: LED8.2 65.86,14.51 64.87,13.52 62.55,13.52 R22.2
N$49
  Top 0.61: R23.2 64.37,11.24 65.51,12.38 66.4,12.38 66.89,12.88 LED8.3
N$50
  Top 0.61: LED8.1 67.65,15.55 R24.2
N$51  (via drill 3.2 pad 0.25)
  other vias: 60.58,3.34
N$52  (via drill 3.2 pad 0.25)
  other vias: 73.28,16.04
N$53
  Top 0.61: R29.2 26.37,29.24 27.51,30.38 28.4,30.38 28.89,30.88 LED10.3
N$54
  Top 0.61: LED10.1 29.65,33.55 R30.2
N$55  (via drill 3.2 pad 0.25)
  other vias: 22.58,21.34
N$56  (via drill 3.2 pad 0.25)
  other vias: 35.28,34.04
N$57
  Top 0.61: LED11.2 46.86,32.51 45.87,31.52 43.55,31.52 R31.2
N$58
  Top 0.61: R32.2 45.37,29.24 46.51,30.38 47.4,30.38 47.9,30.88 LED11.3
N$59
  Top 0.61: LED11.1 48.65,33.55 R33.2
N$60  (via drill 3.2 pad 0.25)
  other vias: 41.58,21.34
N$61  (via drill 3.2 pad 0.25)
  other vias: 54.28,34.04
N$62
  Top 0.61: LED12.2 65.86,32.51 64.87,31.52 62.55,31.52 R34.2
N$63
  Top 0.61: R35.2 64.37,29.24 65.51,30.38 66.4,30.38 66.89,30.88 LED12.3
N$64
  Top 0.61: LED12.1 67.65,33.55 R36.2
N$65  (via drill 3.2 pad 0.25)
  other vias: 60.58,21.34
N$66  (via drill 3.2 pad 0.25)
  other vias: 73.28,34.04
P1
  Top 0.508: L4.A 72.5,73.31 | 72.5,73.31 73.49,73.31 | 72.5,73.31 73.26,72.88 SV3.4 73.25,73.76 72.5,73.31
  Top 0.61: 73.49,73.31 SV3.4
P3
  Bottom 0.508: SERMO1.3 55.9,84.01 | 55.9,84.01 50.78,78.89 50.27,78.89 46.97,78.89 42.1,74.02 | SV4.4 42.1,74.02 | 42.1,74.02 41.25,73.79 SV4.4 | 42.1,74.02 41.87,73.17 SV4.4 | 55.9,84.01 56.75,84.24 SERMO1.3 | 55.9,84.01 56.13,84.86 SERMO1.3
P4
  Bottom 0.508: SERMO.3 17.9,84.01 | 17.9,84.01 12.78,78.89 12.27,78.89 8.97,78.89 4.1,74.02 | SV2.4 4.1,74.02 | 4.1,74.02 3.25,73.79 SV2.4 | 4.1,74.02 3.87,73.17 SV2.4 | 17.9,84.01 18.75,84.24 SERMO.3 | 17.9,84.01 18.13,84.86 SERMO.3
P5
  Bottom 0.508: SERMO.4 15.36,84.01 | 15.36,84.01 10.9,79.55 8.69,79.55 6.26,77.11 2.87,77.11 2.11,76.35 2.11,72.03 2.66,71.48 | SV2.3 2.66,71.48 | 2.66,71.48 2.89,70.63 SV2.3 | 2.66,71.48 3.51,71.25 SV2.3 | 15.36,84.01 16.21,84.24 SERMO.4 | 15.36,84.01 15.59,84.86 SERMO.4
P8
  Top 0.508: L2.A 34.49,73.31 | 34.49,73.31 35.49,73.31 | 34.49,73.31 35.26,72.88 SV1.4 35.25,73.76 34.49,73.31
  Top 0.61: 35.49,73.31 SV1.4
P9
  Bottom 0.508: SERMO1.4 53.36,84.01 | 53.36,84.01 48.9,79.55 46.69,79.55 44.26,77.11 40.87,77.11 40.11,76.35 40.11,72.03 40.66,71.48 | SV4.3 40.66,71.48 | 40.66,71.48 40.89,70.63 SV4.3 | 40.66,71.48 41.51,71.25 SV4.3 | 53.36,84.01 54.21,84.24 SERMO1.4 | 53.36,84.01 53.59,84.86 SERMO1.4
P11
  Top 0.508: L6.A 34.49,48.31 | 34.49,48.31 35.49,48.31 | 34.49,48.31 35.26,47.88 SV5.4 35.25,48.76 34.49,48.31
  Top 0.61: 35.49,48.31 SV5.4
P13
  Bottom 0.508: SERMO2.3 17.9,59.01 | 17.9,59.01 12.78,53.89 12.27,53.89 8.97,53.89 4.1,49.02 | SV6.4 4.1,49.02 | 4.1,49.02 3.25,48.79 SV6.4 | 4.1,49.02 3.87,48.17 SV6.4 | 17.9,59.01 18.75,59.24 SERMO2.3 | 17.9,59.01 18.13,59.86 SERMO2.3
P14
  Bottom 0.508: SERMO2.4 15.36,59.01 | 15.36,59.01 10.9,54.55 8.69,54.55 6.26,52.11 2.87,52.11 2.11,51.35 2.11,47.03 2.66,46.48 | SV6.3 2.66,46.48 | 2.66,46.48 2.89,45.63 SV6.3 | 2.66,46.48 3.51,46.25 SV6.3 | 15.36,59.01 16.21,59.24 SERMO2.4 | 15.36,59.01 15.59,59.86 SERMO2.4
P16
  Top 0.508: L8.A 72.5,48.31 | 72.5,48.31 73.49,48.31 | 72.5,48.31 73.26,47.88 SV7.4 73.25,48.76 72.5,48.31
  Top 0.61: 73.49,48.31 SV7.4
P18
  Bottom 0.508: SERMO3.3 55.9,59.01 | 55.9,59.01 50.78,53.89 50.27,53.89 46.97,53.89 42.1,49.02 | SV8.4 42.1,49.02 | 42.1,49.02 41.25,48.79 SV8.4 | 42.1,49.02 41.87,48.17 SV8.4 | 55.9,59.01 56.75,59.24 SERMO3.3 | 55.9,59.01 56.13,59.86 SERMO3.3
P19
  Bottom 0.508: SERMO3.4 53.36,59.01 | 53.36,59.01 48.9,54.55 46.69,54.55 44.26,52.11 40.87,52.11 40.11,51.35 40.11,47.03 40.66,46.48 | SV8.3 40.66,46.48 | 40.66,46.48 40.89,45.63 SV8.3 | 40.66,46.48 41.51,46.25 SV8.3 | 53.36,59.01 54.21,59.24 SERMO3.4 | 53.36,59.01 53.59,59.86 SERMO3.4
RANGE4
  Top 0.61: U$13.RANGE 14.73,7.3 15.67,6.36 15.67,4.29 | 15.67,4.29 CN5.6 | 15.67,4.29 15.46,3.66 CN5.6 | 15.67,4.29 15.88,3.66 CN5.6
RANGE5
  Top 0.61: U$15.RANGE 33.73,7.3 34.67,6.36 34.67,4.29 | 34.67,4.29 CN6.6 | 34.67,4.29 34.46,3.66 CN6.6 | 34.67,4.29 34.88,3.66 CN6.6
RANGE6
  Top 0.61: U$17.RANGE 52.73,7.3 53.67,6.36 53.67,4.29 | 53.67,4.29 CN7.6 | 53.67,4.29 53.46,3.66 CN7.6 | 53.67,4.29 53.88,3.66 CN7.6
RANGE7
  Top 0.61: U$19.RANGE 71.73,7.3 72.67,6.36 72.67,4.29 | 72.67,4.29 CN8.6 | 72.67,4.29 72.46,3.66 CN8.6 | 72.67,4.29 72.88,3.66 CN8.6
RANGE8
  Top 0.61: U$11.RANGE 14.73,25.3 15.67,24.36 15.67,22.29 | 15.67,22.29 CN9.6 | 15.67,22.29 15.46,21.66 CN9.6 | 15.67,22.29 15.88,21.66 CN9.6
RANGE9
  Top 0.61: U$21.RANGE 33.73,25.3 34.67,24.36 34.67,22.29 | 34.67,22.29 CN10.6 | 34.67,22.29 34.46,21.66 CN10.6 | 34.67,22.29 34.88,21.66 CN10.6
RANGE10
  Top 0.61: U$23.RANGE 52.73,25.3 53.67,24.36 53.67,22.29 | 53.67,22.29 CN11.6 | 53.67,22.29 53.46,21.66 CN11.6 | 53.67,22.29 53.88,21.66 CN11.6
RANGE11
  Top 0.61: U$25.RANGE 71.73,25.3 72.67,24.36 72.67,22.29 | 72.67,22.29 CN12.6 | 72.67,22.29 72.46,21.66 CN12.6 | 72.67,22.29 72.88,21.66 CN12.6
SCKD
  Top 0.508: 19.54,67.62 19.54,72.38 13.54,78.38 4.4,78.38 | 19.54,67.62 MV1.4 | SV2.6 4.4,78.38 | 19.54,67.62 19.29,67.03 MV1.4 | 19.54,67.62 19.79,67.03 MV1.4 | 4.4,78.38 3.63,78.82 SV2.6 | 4.4,78.38 3.63,77.94 SV2.6
SCKD1
  Top 0.508: 57.54,67.62 57.54,72.38 51.54,78.38 42.4,78.38 | 57.54,67.62 MV2.4 | SV4.6 42.4,78.38 | 57.54,67.62 57.29,67.03 MV2.4 | 57.54,67.62 57.79,67.03 MV2.4 | 42.4,78.38 41.63,78.82 SV4.6 | 42.4,78.38 41.63,77.94 SV4.6
SCKD2
  Top 0.508: 19.54,42.62 19.54,47.38 13.54,53.38 4.4,53.38 | 19.54,42.62 MV3.4 | SV6.6 4.4,53.38 | 19.54,42.62 19.29,42.02 MV3.4 | 19.54,42.62 19.79,42.02 MV3.4 | 4.4,53.38 3.63,53.82 SV6.6 | 4.4,53.38 3.63,52.94 SV6.6
SCKD3
  Top 0.508: 57.54,42.62 57.54,47.38 51.54,53.38 42.4,53.38 | 57.54,42.62 MV4.4 | SV8.6 42.4,53.38 | 57.54,42.62 57.29,42.02 MV4.4 | 57.54,42.62 57.79,42.02 MV4.4 | 42.4,53.38 41.63,53.82 SV8.6 | 42.4,53.38 41.63,52.94 SV8.6

## Text on the board
tPlace: Project Aquila | Project Aquila | Project Aquila | Project Aquila
tNames: SDA | SCL | GND | VCC | SDA | SCL | GND | VCC | RST | RST | P0 | P0 | BOOT | BOOT | P1 | P1 | SYN | SYN | P2 | P2 | P9 | P9 | P3 | P3 | P8 | P8 | P4 | P4 | P7 | P7 | P5 | P5 | VIN | VIN | P6 | GND | P6 | GND | G | G | 3.3V | Designed by Aquila | 3.3V | Designed by Aquila | SDA | SCL | GND | VCC | SDA | SCL | GND | VCC | RST | RST | P0 | P0 | BOOT | BOOT | P1 | P1 | SYN | SYN | P2 | P2 | P9 | P9 | P3 | P3 | P8 | P8 | P4 | P4 | P7 | P7 | P5 | P5 | VIN | VIN | P6 | GND | P6 | GND | G | G | 3.3V | Designed by Aquila | 3.3V | Designed by Aquila | VCC | VCC | VCC | VCC | GND | GND | GND | GND | VCC | VCC | VCC | VCC | GND | GND | GND | GND
tValues: 2018 | 2018 | P0:PB15/MOSI / P1:PB14/MISO / P2:PB13/SCLK / P3:PB12/SS / P4:PB10/TXD/SCL / P5:PB11/RXD/SDA / P6:PA5/ADC/DAC / P7:PD12/SERVO1 / P8:PD13/SERVO2 / P9:PD14/SERVO3 | P0:PB15/MOSI / P1:PB14/MISO / P2:PB13/SCLK / P3:PB12/SS / P4:PB10/TXD/SCL / P5:PB11/RXD/SDA / P6:PA5/ADC/DAC / P7:PD12/SERVO1 / P8:PD13/SERVO2 / P9:PD14/SERVO3 | 2018 | 2018 | P0:PB15/MOSI / P1:PB14/MISO / P2:PB13/SCLK / P3:PB12/SS / P4:PB10/TXD/SCL / P5:PB11/RXD/SDA / P6:PA5/ADC/DAC / P7:PD12/SERVO1 / P8:PD13/SERVO2 / P9:PD14/SERVO3 | P0:PB15/MOSI / P1:PB14/MISO / P2:PB13/SCLK / P3:PB12/SS / P4:PB10/TXD/SCL / P5:PB11/RXD/SDA / P6:PA5/ADC/DAC / P7:PD12/SERVO1 / P8:PD13/SERVO2 / P9:PD14/SERVO3 | Designed by Aquila | Designed by Aquila | Designed by Aquila | Designed by Aquila | 2018 | 2018 | 2018 | 2018 | Designed by Aquila | Designed by Aquila | Designed by Aquila | Designed by Aquila | 2018 | 2018 | 2018 | 2018
bValues: Project Aquila | Project Aquila | Project Aquila | Project Aquila | Project Aquila | Project Aquila | Project Aquila | Project Aquila